# Altium PCB ETL_RB.PcbDoc (part 3 of 3)
Units mm, origin at the board's own origin, x right, y up, seen from the top; angles counter-clockwise.
Board outline 130.3 x 56.5 mm, 8 copper layers (Top Layer, plane 1, M1, plane 2, plane 3, M2, plane 4, Bottom Layer), stack 0.937 mm thick; 226 components, 231 nets, 2035 pads, 85 vias.
Unrouted connection lines stored in the file: 487.
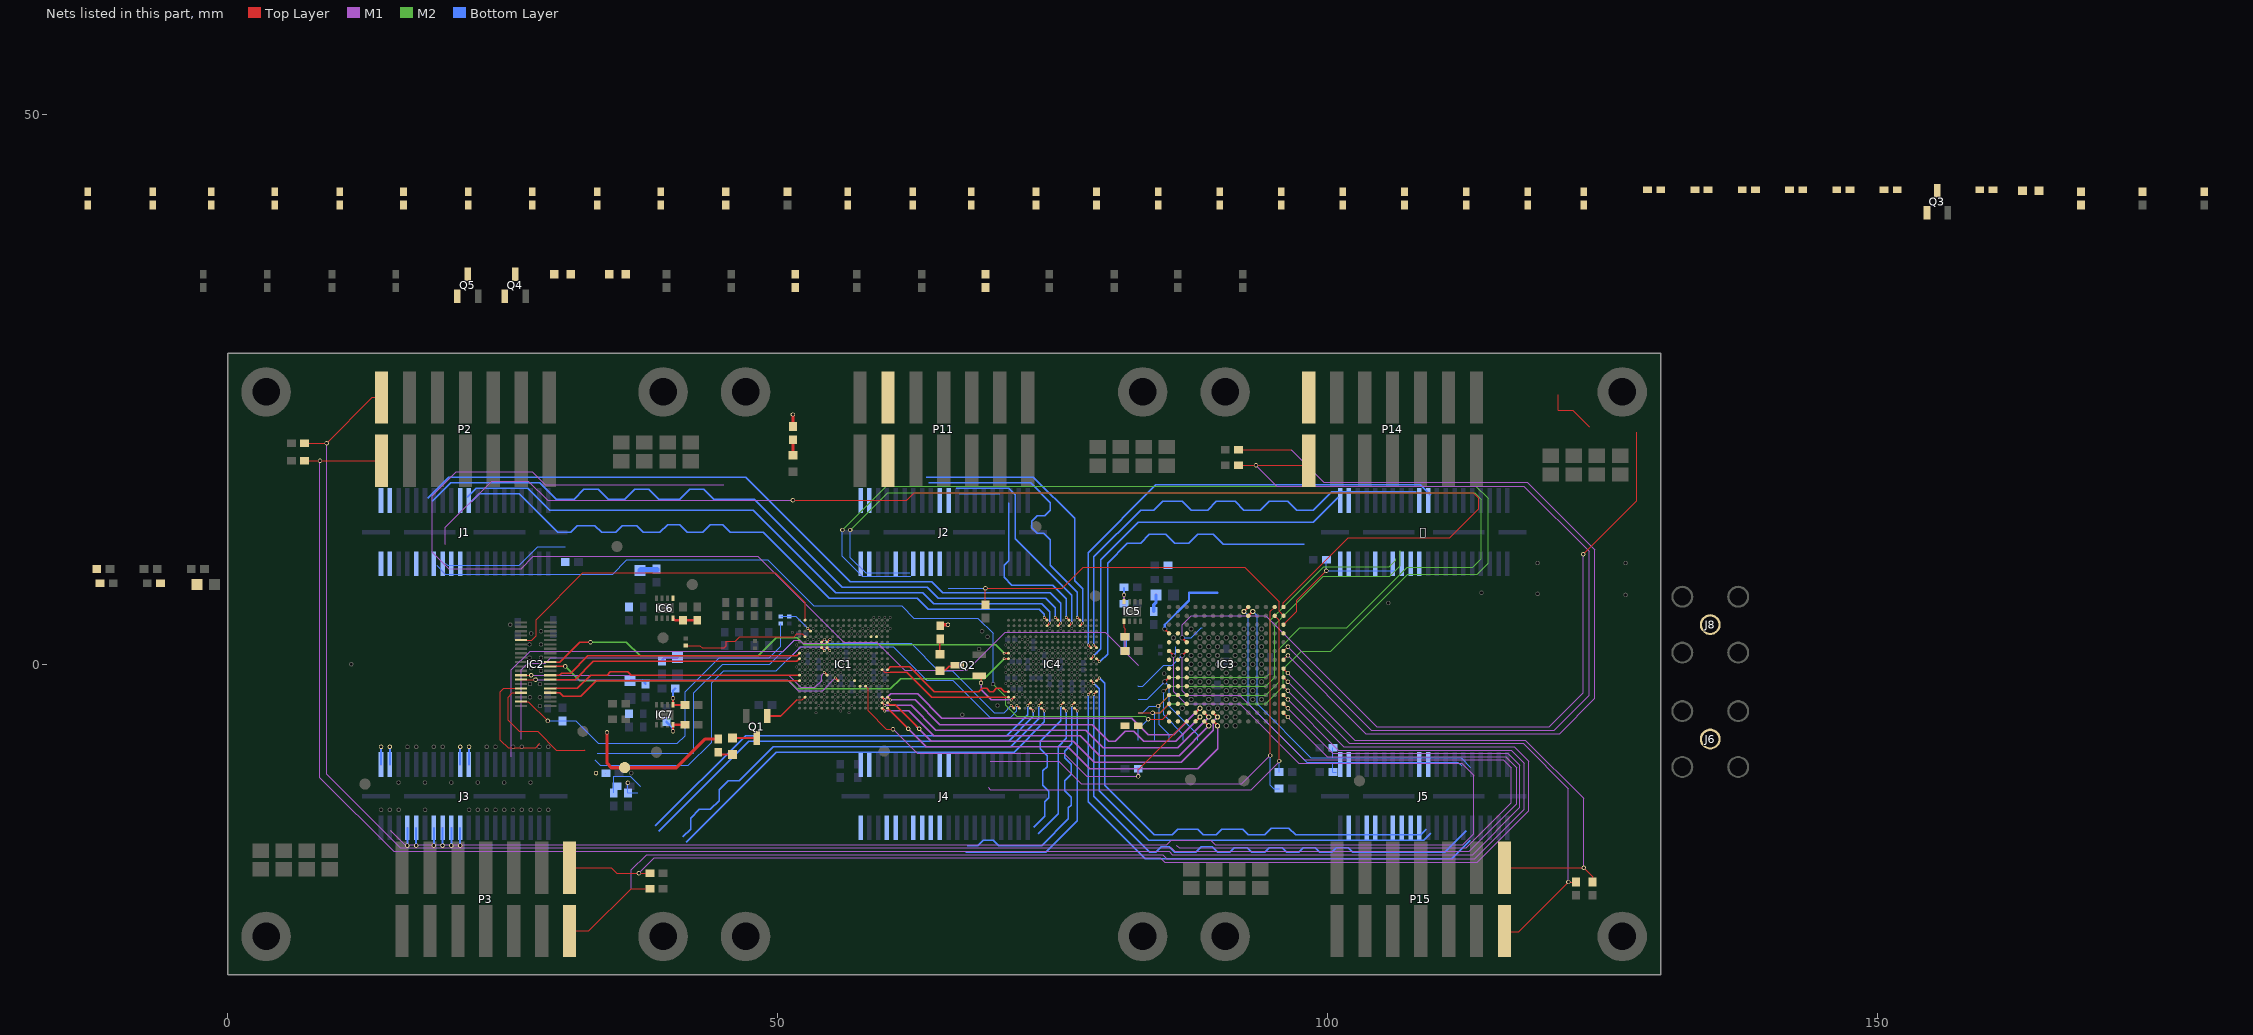
[diagram p9: the nets of this part, all layers, seen from the top]

## Via types
v1: diameter 0.4, hole 0.25, Top Layer to Bottom Layer, 85 vias

## Nets (pads, with @x,y where several pads share a name; then routed paths per layer and width w, separated by ;. In a path a pad name is that pad's centre, name@x,y a point inside that pad or via, vN(x,y) a via of type N, cw(c..) or ccw(c..) an arc to the next point about the centre after c; other vN are vias at no path point) (continued)
LD_DIS: IC1.L6 IC2.16 pad.1@27.6,-1 pad.1@54.25,-0.75 | length 29.2
  Top Layer w0.102: IC2.16@26.67,-1 pad.1@27.6,-1
  Top Layer w0.13: pad.1@54.25,-0.75 IC1.L6@54.5,-1
  M1 w0.102: pad.1@27.6,-1 51,-1 52.1,-2.1 53.4,-2.1 54,-1.5 54,-1 pad.1@54.25,-0.75
LD_RSTN: IC1.M8 IC2.14 pad.1@28,-1.4 pad.1@55.25,-1.25 | length 29.8
  Top Layer w0.102: IC2.14@26.67,-1.4 pad.1@28,-1.4
  Top Layer w0.13: pad.1@55.25,-1.25 IC1.M8@55.5,-1.5
  M1 w0.102: pad.1@28,-1.4 50.9,-1.4 51.9,-2.4 54.1,-2.4 pad.1@55.25,-1.25
led0: IC1.N12 Q4.1
led1: IC1.M11 Q5.1
lv_mon: C30.2 IC3.M4 R17.1 R19.2
LV_RB: P11.3 P11.4 pad.1@65.5,3.6 R1.1 R3.1 R16.1 R17.2 R18.1 R24.1 R129.1 R130.1 R131.1 R142.1 TP5.1 | length 16
  Top Layer w0.3: v1(34.5,-6.2) 34.5,-9 34.9,-9.4 TP5.1@36.1,-9.4 40.8,-9.4 43.4,-6.8 R142.1@44.6,-6.8 ; R1.1@51.4,21.6 v1(51.4,22.7) ; R3.1@64.8,3.505 64.895,3.6 pad.1@65.5,3.6
M1SCL: IC1.E6 J1.39 pad.1@33.5,-9.9 pad.1@54.775,2.25 R103.2 | length 38.6
  Top Layer w0.13: IC1.E6@54.5,2 54.75,2.25 pad.1@54.775,2.25
  M1 w0.102: 25.8,-8.4 25.8,-0.5 27.5,1.2 50.5,1.2 51.5,2.2 52,2.2 52.3,1.9 54.425,1.9 pad.1@54.775,2.25
M1SDA: IC1.F6 J1.37 pad.1@54.75,1.25 R104.2 | length 35.7
  Top Layer w0.13: IC1.F6@54.5,1.5 pad.1@54.75,1.25
  M1 w0.102: 26.7,-6.8 26.7,-0.5 27.3,0.1 28.9,0.1 29.4,0.6 51.1,0.6 52.1,1.6 54.4,1.6 pad.1@54.75,1.25
M2SCL: IC1.E5 IC2.10 IC4.U2 pad.1@54.275,2.25 pad.1@71.25,-3.75 R105.1 | length 63.9
  Top Layer w0.102: IC2.10@26.67,-2.2 25.1,-2.2 24.8,-2.5 24.8,-6.9 25.5,-7.6 28,-7.6 28.4,-7.2
  Top Layer w0.13: IC1.E5@54,2 54.25,2.25 pad.1@54.275,2.25 ; pad.1@71.25,-3.75 IC4.U2@71.5,-4
  Bottom Layer w0.102: 33.6,-8.1 42.34,-8.1 42.4,-8.04 42.4,-2.6 45,0 49.3,0 51.5,2.2 52,2.2 52.3,1.9 53.925,1.9 pad.1@54.275,2.25 54.625,1.9 62.145,1.9 64.622,-0.577 65.877,-0.577 69.7,-4.4 70.6,-4.4 pad.1@71.25,-3.75 ; R105.1@35.1,-11.7 35.1,-10.2 36.6,-10.2 37.5,-11.1
M2SDA: IC1.F5 IC2.8 IC4.U3 pad.1@54.251,1.226 pad.1@71.75,-3.75 R106.1 | length 64
  Top Layer w0.102: IC2.8@26.67,-2.6 25.9,-2.6 25.5,-3 25.5,-5.1 26.5,-6.1 28.2,-6.1 29.9,-7.8 32.473,-7.8 32.5,-7.773
  Top Layer w0.13: IC1.F5@54,1.5 54.251,1.249 pad.1@54.251,1.226 ; pad.1@71.75,-3.75 IC4.U3@72,-4
  Bottom Layer w0.102: 33.4,-8.7 33.9,-9.2 41.9,-9.2 44,-7.1 44,-1.7 45.1,-0.6 49.9,-0.6 52.1,1.6 53.877,1.6 pad.1@54.251,1.226 54.625,1.6 60.5,1.6 63.55,-1.45 65.95,-1.45 69.3,-4.8 71.2,-4.8 71.75,-4.25 pad.1@71.75,-3.75 ; v1(36.4,-10.773) R106.1@36.4,-11.7 37.3,-11.7
m_tx_n: IC1.G1 IC2.15 | length 23.5
  Top Layer w0.12: IC2.15@29.33,-1 30.165,-1 30.365,-0.8 31.2,-0.8 32.75,0.75 51.75,0.75 IC1.G1@52,1
m_tx_p: IC1.H1 IC2.13 | length 23.5
  Top Layer w0.12: IC2.13@29.33,-1.4 31.6,-1.4 33.25,0.25 51.75,0.25 IC1.H1@52,0.5
MASTER_READY: IC1.R2 Q1.1 | length 4.1
  Top Layer w0.076: 51.75,-3.25 52.25,-3.25 IC1.R2@52.5,-3
  Top Layer w0.15: Q1.1@49.068,-4.7 50.3,-4.7 51.75,-3.25
mod_a0: C201.2 IC3.N14 J1.21
mod_a1: C3.2 IC3.P14 J1.23
mod_a2: C4.2 IC3.N13 J1.25
mod_a3: C5.2 IC3.P13 J1.27 | length 79.3
  Top Layer w0.102: v1(83.7,-5) 85,-5 IC3.P13@85.6,-4.4
  M2 w0.102: 69.6,-1.8 70.75,-2.95 70.75,-3.75 71.75,-4.75 83.45,-4.75 v1(83.7,-5)
  Bottom Layer w0.102: 19,9 19.8,8.2 35,8.2 36.3,9.5 49.1,9.5 53.3,5.3 61.3,5.3 62.4,4.2 68.2,4.2 69.6,2.8 69.6,-1.8 ; 82.8,-6.9 82.8,-5.6 83.1,-5.6 v1(83.7,-5)
mod_a4: C6.2 IC3.M12
mod_a5: C7.2 IC3.N12 J3.21 pad.1@21.145,-16.491 | length 1.7
  Bottom Layer w0.178: pad.1@21.15,-16.53 J3.21@21.15,-14.865
mod_a6: C8.2 IC3.P12 J3.23 pad.1@20.345,-16.491 | length 120.5
  Top Layer w0.102: 82.8,-4.4 v1(84.1,-4.4) 84.8,-4.4 IC3.P12@85.6,-3.6
  M2 w0.102: v1(55.9,12.2) 59.9,16.2 113.5,16.2 114.6,15.1 114.6,9.2 113.6,8.2 107.3,8.2 100.3,1.2 97.6,1.2 96,-0.4 96,-2 94.4,-3.6 85.6,-3.6 84.8,-4.4 v1(84.1,-4.4)
  Bottom Layer w0.102: v1(55.9,12.2) 55.9,9.8 57.7,8 62.1,8 ; v1(84.1,-4.4) 84.3,-4.6 84.3,-6.9
  Bottom Layer w0.178: pad.1@20.35,-16.53 J3.23@20.35,-14.865
mod_a7: C9.2 IC3.M11 J3.25 pad.1@19.545,-16.491 | length 1.7
  Bottom Layer w0.178: pad.1@19.55,-16.53 J3.25@19.55,-14.865
mod_a8: C10.2 IC3.N11 J3.27 pad.1@18.745,-16.491 | length 1.7
  Bottom Layer w0.178: pad.1@18.75,-16.53 J3.27@18.75,-14.865
mod_a9: C11.2 IC3.P11 J2.21 | length 116.6
  Top Layer w0.102: v1(84.6,-3.8) IC3.P11@85.6,-2.8
  M2 w0.102: v1(56.6,12.2) 60,15.6 113.4,15.6 114,15 114,9.6 113.2,8.8 107.262,8.8 101.762,3.3 97.5,3.3 95.6,1.4 95.6,-1.6 94.4,-2.8 85.6,-2.8 v1(84.6,-3.8)
  Bottom Layer w0.102: v1(56.6,12.2) 56.6,9.7 58,8.3 62,8.3 ; 82.8,-4.4 83.2,-4.4 83.8,-3.8 v1(84.6,-3.8) 84.7,-3.9 84.7,-5.5 85.6,-6.4 85.6,-6.9
mod_a10: C12.2 IC3.M10 J2.23
mod_a11: C13.2 IC3.N10 J2.25
mod_a12: C14.2 IC3.P10 J2.27 | length 36.3
  Top Layer w0.102: 85.1,-2.45 85.15,-2.45 IC3.P10@85.6,-2
  M2 w0.102: 85.1,-2.45 85.15,-2.45 85.6,-2 94.4,-2 95.2,-1.2 95.2,3.6 99.619,8.019 105.681,8.019 106.6,8.938 106.6,10.3
  Bottom Layer w0.102: 85.1,-2.45 85.1,-4.6 86.9,-6.4 86.9,-6.9
mod_a13: C15.2 IC3.M9 J4.21
mod_a14: C16.2 IC3.N9 J4.23
mod_a15: C17.2 IC3.P9 J4.25 | length 38.7
  Top Layer w0.13: 85.2,-1.6 IC3.P9@85.6,-1.2
  M2 w0.102: 85.2,-1.6 85.6,-1.2 94.4,-1.2 94.8,-0.8 94.8,4 99.681,8.881 105.619,8.881 106.2,9.462 106.2,9.6
  Bottom Layer w0.102: 82.8,-3.2 83.6,-3.2 85.2,-1.6 85.6,-2 85.6,-3.8 88.2,-6.4 88.2,-6.9
mod_a16: C18.2 IC3.M8 J4.27
mod_a17: .21 C19.2 IC3.N8
mod_a18: .23 C20.2 IC3.P8
mod_a19: .25 C21.2 IC3.M7
mod_a20: .27 C22.2 IC3.N7
mod_a21: C23.2 IC3.P7 J5.21
mod_a22: C24.2 IC3.M6 J5.23 | length 77.2
  Top Layer w0.13: 86.8,0.8 IC3.M6@87.2,1.2
  M1 w0.102: 86.25,-16.45 86.5,-16.7 112.6,-16.7 116.7,-12.6 116.7,-9.4 116,-8.7 97.9,-8.7 92,-2.8 87.2,-2.8 86.8,-2.4 86.8,0.8
  Bottom Layer w0.102: 82.8,-1.95 82.8,-2 83.2,-2 85.1,-0.1 85.9,-0.1 86.8,0.8
mod_a23: C25.2 IC3.N6 J5.25 | length 105.2
  M1 w0.102: 45.1,16.3 28.9,16.3 27.7,17.5 20.8,17.5 18.6,15.3 18.6,10.2 20.1,8.7 26.7,8.7 27.8,9.8 48.2,9.8 56,2 59,2 61.55,-0.55 67.25,-0.55 70.7,2.9 79.8,2.9 82.8,-0.1
mod_a24: C26.2 IC3.P6 J5.27 | length 140.3
  Top Layer w0.13: IC3.P6@85.6,1.2 86,0.8
  M1 w0.102: 14.8,-15.1 16.1,-16.4 85.4,-16.4 85.8,-16 89.4,-16 89.8,-16.4 112.3,-16.4 113.3,-15.4 113.3,-10.1 112.2,-9 97.4,-9 92,-3.6 87.1,-3.6 86,-2.5 86,0.8
  Bottom Layer w0.102: 86,0.8 86.2,1 86.2,1.6
mod_d0: J1.31
mod_d2: J3.31 pad.1@17.145,-16.491 | length 1.7
  Bottom Layer w0.178: pad.1@17.15,-16.53 J3.31@17.15,-14.865
mod_d3: J3.33 pad.1@16.345,-16.491 | length 1.7
  Bottom Layer w0.178: pad.1@16.35,-16.53 J3.33@16.35,-14.865
mod_d4: J2.31
mod_d6: J4.31
mod_d7: J4.33
mod_d8: .31
mod_d10: J5.31
mod_d11: J5.33
NetC3_1: C3.1 C4.1 C5.1 C6.1 C7.1 C8.1 C9.1 C10.1 C11.1 C12.1 C13.1 C14.1 C15.1 C16.1 C17.1 C18.1 C19.1 C20.1 C21.1 C22.1 C23.1 C24.1 C25.1 C26.1 C27.1 C28.1 C29.1 C30.1 C31.1 C32.1 C201.1
NetC27_2: C27.2 IC3.M5 | length 76.7
  Top Layer w0.102: 121,24.5 121,23.1 122.3,23.1 123.8,21.6 ; v1(123.25,10) 128.1,14.85 128.1,21.1
  Top Layer w0.13: 86.8,2.4 IC3.M5@87.2,2
  M1 w0.102: 86.8,2.4 86.8,3.6 87.6,4.4 94.4,4.4 104.5,-5.7 120.15,-5.7 123.25,-2.6 v1(123.25,10)
  Bottom Layer w0.102: 86.8,2.4 87.6,2.4 88.5,3.3 88.6,3.3
NetC28_2: C28.2 IC3.N5
NetC29_2: C29.2 IC3.P5
NetC31_2: C31.2 IC3.N4
NetC32_2: C32.2 IC3.P4 | length 7.4
  Top Layer w0.13: 85.2,3.2 IC3.P4@85.6,2.8
  Bottom Layer w0.2: 85.2,3.2 85.2,3.6 87.4,5.8 87.4,6.5 90,6.5
NetC107_1: C107.1 R111.2 | length 1.6
  Bottom Layer w0.3: R111.2@84.2,4.8 84.2,5.4 84.4,5.6 C107.1@84.4,6.3
NetC155_1: C155.1 R128.2 | length 1.3
  Bottom Layer w0.3: C155.1@81.6,1.2 R128.2@81.6,2.5
NetD1_1: D1.1 R1.2 | length 1.4
  Top Layer w0.3: R1.2@51.4,20.4 51.409,20.391 51.409,19.004 D1.1@51.417,18.995
NetD2_1: D2.1 R142.2 | length 1.4
  Top Layer w0.2: R142.2@44.6,-8 44.8,-8.2 D2.1@45.911,-8.2
NetD2_2: D2.2 Q1.3 | length 2.2
  Top Layer w0.2: D2.2@45.911,-6.7 Q1.3@48.118,-6.7
NetD3_1: D3.1 R3.2 | length 1.4
  Top Layer w0.13: D3.1@64.768,0.9 64.768,2.273 R3.2@64.8,2.305
NetD3_2: D3.2 Q2.3 | length 1.8
  Top Layer w0.13: D3.2@64.768,-0.6 64.868,-0.5 65.3,-0.5 65.606,-0.194 66.256,-0.194 Q2.3@66.35,-0.1
NetD4_1: D4.1 R16.2
NetD4_2: D4.2 Q3.3
NetD5_1: D5.1 R24.2
NetD5_2: D5.2 Q4.3
NetD6_1: D6.1 R18.2
NetD6_2: D6.2 Q5.3
NetIC1_R16: IC1.R16 IC3.L13 pad.1@59.75,-3.25 pad.1@88.4,-4 | length 32.3
  Top Layer w0.13: IC1.R16@59.5,-3 pad.1@59.75,-3.25 ; IC3.L13@88,-4.4 pad.1@88.4,-4
  M1 w0.12: pad.1@59.75,-3.25 60.3,-2.7 62.75,-2.7 64.95,-4.9 82.2,-4.9 83.7,-6.4 86,-6.4 pad.1@88.4,-4
NetIC1_R17: IC1.R17 IC3.L14 pad.1@60.25,-3.25 pad.1@88.4,-4.8 | length 32.3
  Top Layer w0.13: IC1.R17@60,-3 pad.1@60.25,-3.25 ; IC3.L14@88,-5.2 pad.1@88.4,-4.8
  M1 w0.12: pad.1@60.25,-3.25 62.5,-3.25 64.75,-5.5 78.6,-5.5 80.1,-7 80.7,-7 81.6,-6.1 82.4,-6.1 83.3,-7 86.2,-7 pad.1@88.4,-4.8
NetIC1_T16: IC1.T16 IC3.K13 pad.1@59.75,-3.75 pad.1@89.2,-4.8 | length 33.1
  Top Layer w0.13: IC1.T16@59.5,-3.5 pad.1@59.75,-3.75 ; IC3.K13@88.8,-4.4 pad.1@89.2,-4.8
  M1 w0.12: pad.1@59.75,-3.75 62.15,-3.75 64.4,-6 78,-6 79.6,-7.6 86.4,-7.6 pad.1@89.2,-4.8
NetIC1_T17: IC1.T17 IC3.J13 pad.1@62.875,-5.875 pad.1@90,-4.8 | length 35.7
  Top Layer w0.12: IC1.T17@60,-3.5 60.2,-3.7 60.7,-3.7 pad.1@62.875,-5.875
  Top Layer w0.13: IC3.J13@89.6,-4.4 pad.1@90,-4.8
  M1 w0.12: pad.1@62.875,-5.875 62.871,-5.875 62.625,-5.629 63.996,-7 76.9,-7 78.8,-8.9 86.7,-8.9 89.6,-6 89.6,-5.2 pad.1@90,-4.8
NetIC1_U16: IC1.U16 IC3.K14 pad.1@59.75,-4.25 pad.1@89.2,-5.6 | length 33.2
  Top Layer w0.13: IC1.U16@59.5,-4 pad.1@59.75,-4.25 ; IC3.K14@88.8,-5.2 pad.1@89.2,-5.6
  M1 w0.12: pad.1@59.75,-4.25 61.95,-4.25 64.2,-6.5 77.5,-6.5 79.3,-8.3 86.5,-8.3 pad.1@89.2,-5.6
NetIC1_U17: IC1.U17 IC3.J14 pad.1@61.875,-5.875 pad.1@90,-5.6 | length 35.7
  Top Layer w0.12: IC1.U17@60,-4 pad.1@61.875,-5.875
  Top Layer w0.13: IC3.J14@89.6,-5.2 pad.1@90,-5.6
  M1 w0.12: pad.1@61.875,-5.875 63.5,-7.5 76.4,-7.5 78.4,-9.5 88.2,-9.5 90,-7.7 pad.1@90,-5.6
NetIC5_4: IC5.4 R126.1 R127.2 | length 2.2
  Top Layer w0.102: IC5.4@81.5,5.7 v1(81.5,6.3)
  Bottom Layer w0.2: R127.2@81.5,5.5 v1(81.5,6.3) 81.5,6.2 R126.1@81.5,6.9
NetIC5_5: IC5.5 R112.1 R113.2 | length 2.7
  Top Layer w0.102: IC5.5@81.5,3.9 81.5,3.3 81.6,3.2 R112.1@81.6,1.2
NetJ4_39: J4.39 R15.2
NetJ5_37: J5.37 R14.2
ON0: IC3.A12 P2.1 pad.1@96.4,-4 R233.1 | length 177.2
  Top Layer w0.102: R233.1@7,18.5 v1(8.4,18.5) P2.1@14,18.5 ; IC3.A12@96,-3.6 pad.1@96.4,-4
  M1 w0.102: v1(8.4,18.5) 8.4,-10.3 15.1,-17 85.6,-17 85.9,-17.3 113.2,-17.3 117.5,-13 117.5,-9.2 116.4,-8.1 100.5,-8.1 pad.1@96.4,-4
ON1: IC3.A10 P3.1 pad.1@96.4,-2.4 R234.1 | length 120.7
  Top Layer w0.102: P3.1@31.1,-18.5 34.9,-18.5 35.4,-19 v1(37.4,-19) R234.1@38.4,-19 ; IC3.A10@96,-2 pad.1@96.4,-2.4
  M1 w0.102: v1(37.4,-19) 38.8,-17.6 84.8,-17.6 85.2,-18 113.6,-18 118.3,-13.3 118.3,-8.8 117,-7.5 101.5,-7.5 pad.1@96.4,-2.4
ON2: IC3.A6 P14.1 pad.1@96.4,1.6 R235.1 | length 85
  Top Layer w0.102: R235.1@91.9,18.1 P14.1@97.9,18.1 ; IC3.A6@96,1.2 pad.1@96.4,1.6
  M1 w0.102: v1(93.5,18.1) 95.4,16.2 117.85,16.2 123.8,10.25 123.8,-2.8 120.6,-6 104,-6 pad.1@96.4,1.6
ON3: IC3.A8 P15.1 pad.1@96.4,-0.8 R236.1 | length 47.3
  Top Layer w0.102: IC3.A8@96,-0.4 pad.1@96.4,-0.8 ; P15.1@116.1,-18.5 v1(123.3,-18.5) 124.1,-19.3 R236.1@124.1,-19.8
  M1 w0.102: pad.1@96.4,-0.8 102.5,-6.9 118,-6.9 123.3,-12.2 v1(123.3,-18.5)
PG0: IC3.A13 P2.2 pad.1@96.4,-4.8 R202.1 | length 178.3
  Top Layer w0.102: R202.1@7,20.1 v1(9,20.1) 13.15,24.25 P2.2@14,24.25 ; IC3.A13@96,-4.4 pad.1@96.4,-4.8
  M1 w0.102: v1(9,20.1) 9,-10 15.7,-16.7 85.8,-16.7 86.1,-17 112.9,-17 117.2,-12.7 117.2,-9.4 116.2,-8.4 100,-8.4 pad.1@96.4,-4.8
PG1: IC3.A11 P3.2 pad.1@96.4,-3.2 R204.1 | length 123.1
  Top Layer w0.102: P3.2@31.1,-24.25 32.85,-24.25 36.7,-20.4 R204.1@38.4,-20.4 ; IC3.A11@96,-2.8 pad.1@96.4,-3.2
  M1 w0.102: 36.7,-20.4 36.7,-18.7 38.1,-17.3 85,-17.3 85.4,-17.7 113.4,-17.7 117.9,-13.2 117.9,-9 116.7,-7.8 101,-7.8 pad.1@96.4,-3.2
PG2: IC3.A7 P14.2 pad.1@96.4,0.8 R206.1 | length 82.4
  Top Layer w0.102: R206.1@91.9,19.5 96.7,19.5 ; IC3.A7@96,0.4 pad.1@96.4,0.8
  M1 w0.102: pad.1@96.4,0.8 103.5,-6.3 121.1,-6.3 124.3,-3.1 124.3,10.4 118.15,16.55 99.65,16.55 96.7,19.5
PG3: IC3.A9 P15.2 pad.1@96.4,-1.6 R208.1 | length 47
  Top Layer w0.102: IC3.A9@96,-1.2 pad.1@96.4,-1.6 ; P15.2@116.1,-24.25 116.15,-24.3 117.4,-24.3 v1(121.9,-19.8) R208.1@122.6,-19.8
  M1 w0.102: pad.1@96.4,-1.6 102,-7.2 117.8,-7.2 121.9,-11.3 v1(121.9,-19.8)
REFCLKN: IC1.K17 IC4.P1 | length 12.5
  Top Layer w0.12: IC1.K17@60,-0.5 60.25,-0.25 62,-0.25 64.25,-2.5 68.3,-2.5 68.6,-2.2 69,-2.2 69.3,-2.5 69.6,-2.5 69.9,-2.2 70.3,-2.2 70.6,-2.5 IC4.P1@71,-2.5
REFCLKP: IC1.K16 IC4.R1 | length 12.5
  Top Layer w0.076: IC1.K16@59.5,-0.5 59.75,-0.75 60.25,-0.75
  Top Layer w0.12: 60.25,-0.75 61.75,-0.75 64,-3 IC4.R1@71,-3
RSSI: IC2.4 R147.2 R148.1 | length 33.3
  Top Layer w0.102: IC2.4@26.67,-3.4 27.35,-3.4 v1(29.1,-5.15)
  Bottom Layer w0.102: v1(29.1,-5.15) R148.1@30.45,-5.15 31.65,-5.15 33.7,-7.2 40.9,-7.2 41.6,-6.5 41.6,-2.5 44.7,0.6 49.25,0.6 50.3,1.65 R147.2@50.3,3.7
RSSI_ADC: IC1.C3 pad.1@52.75,3.25 R146.2 R147.1 | length 3.3
  Top Layer w0.13: pad.1@52.75,3.25 IC1.C3@53,3
  Bottom Layer w0.102: R147.1@50.3,4.35 R146.2@51.05,4.35 51.65,4.35 pad.1@52.75,3.25
RSTB0: IC3.A1 R239.1 | length 132.8
  Top Layer w0.102: v1(51.4,14.9) 61.75,14.9 62.45,15.6 113.25,15.6 113.75,15.1 113.75,14.15 111.1,11.5 101.9,11.5 96,5.6 IC3.A1@96,5.2
  M1 w0.102: 19.8,10.9 19.8,12.45 24,16.65 27.35,16.65 29.1,14.9 v1(51.4,14.9)
  Bottom Layer w0.102: 19.8,9.2 20,9 26.5,9 28.2,10.7 30.7,10.7
RSTB1: IC3.A2 pad.1@68.9,6.9 R238.1 | length 35.1
  Top Layer w0.102: R238.1@68.9,5.4 pad.1@68.9,6.9 75.9,6.9 77.8,8.8 92.5,8.8 95.6,5.7 95.6,4.8 IC3.A2@96,4.4
  Bottom Layer w0.102: 65.5,6.9 pad.1@68.9,6.9
RSTB2: IC3.A3 R237.1 | length 13.8
  Top Layer w0.102: IC3.A3@96,3.6 97.2,4.8 97.2,5.8 v1(99.9,8.5)
  Bottom Layer w0.102: R237.1@99.9,9.5 v1(99.9,8.5) 106.2,8.5
rxesra: C169.1 R125.1 | length 1.6
  Bottom Layer w0.2: C169.1@36.6,-1.5 37.75,-1.5 38,-1.75 R125.1@38,-1.8
rxesrb: C2.1 R11.1 | length 1.6
  Bottom Layer w0.2: R11.1@39.5,0.3 39.5,0.35 39.75,0.6 C2.1@40.9,0.6
rxfba: IC7.4 R123.1 R124.2 | length 2.8
  Top Layer w0.2: v1(40.5,-6.1) IC7.4@40.5,-5.5 R123.1@41.6,-5.5
  Bottom Layer w0.2: R124.2@39.9,-5.2 39.9,-5.25 40.462,-5.812 40.462,-6.062 v1(40.5,-6.1)
rxfbb: IC7.5 R12.1 R13.2 | length 2.7
  Top Layer w0.2: v1(40.5,-3.1) IC7.5@40.5,-3.7 R12.1@41.6,-3.7
  Bottom Layer w0.2: v1(40.5,-3.1) 40.5,-2.4 R13.2@40.7,-2.2
rxn: IC1.M1 IC2.7 | length 23.4
  Top Layer w0.12: IC2.7@29.33,-2.6 30.2,-2.6 30.5,-2.9 32.1,-2.9 33.5,-1.5 IC1.M1@52,-1.5
rxp: IC1.L1 IC2.9 | length 23.4
  Top Layer w0.12: IC2.9@29.33,-2.2 31.8,-2.2 33,-1 34.5,-1 34.8,-0.7 36.4,-0.7 36.7,-1 IC1.L1@52,-1
s_tx_n: IC2.21 IC4.G1 pad.1@70.6,1 | length 44.2
  Top Layer w0.12: IC2.21@29.33,0.2 30.2,0.2 32,2 v1(33,2)
  Top Layer w0.13: pad.1@70.6,1 IC4.G1@71,1
  M2 w0.12: v1(33,2) 36.25,2 37.5,0.75 48.25,0.75 49.9,2.4 51.8,2.4 52.45,1.75 69.85,1.75 pad.1@70.6,1
s_tx_p: IC2.19 IC4.H1 pad.1@70.6,0.5 | length 43.7
  Top Layer w0.12: IC2.19@29.33,-0.2 v1(30.7,-0.2)
  Top Layer w0.13: pad.1@70.6,0.5 IC4.H1@71,0.5
  M2 w0.12: v1(30.7,-0.2) 32,-1.5 51,-1.5 51.75,-2.25 60.25,-2.25 61.2,-1.3 68.8,-1.3 pad.1@70.6,0.5
SCA_GPIO27: IC3.A4 Q3.1
sca_resetb: IC1.N13 IC3.M14 R107.2 | length 36.9
  Top Layer w0.076: IC1.N13@58,-2 58.25,-2.25 58.25,-4.25
  Top Layer w0.102: 58.25,-4.25 59.9,-5.9 v1(60.5,-5.9) ; v1(82.8,-10.2) 82.8,-9.6 IC3.M14@87.2,-5.2
  M1 w0.102: v1(60.5,-5.9) 62.7,-8.1 76,-8.1 78.1,-10.2 v1(82.8,-10.2)
  Bottom Layer w0.2: v1(82.8,-10.2) R107.2@82.8,-9.5
SCL1: IC3.B2 J2.39 R210.1 | length 42
  Top Layer w0.102: IC3.B2@95.2,4.4 95.6,4 v1(95.6,-8.8)
  M1 w0.102: 69.15,-11.2 69.35,-11.4 93.05,-11.4 95.6,-8.85 v1(95.6,-8.8)
  Bottom Layer w0.102: R210.1@95.6,-9.8 v1(95.6,-8.8)
SCL2: .39 IC3.E2 pad.1@93.2,4.8 R244.1 | length 31.8
  Top Layer w0.13: IC3.E2@92.8,4.4 pad.1@93.2,4.8
  Bottom Layer w0.102: pad.1@93.2,4.8 93.6,4.4 93.6,-3.6 98.5,-8.5 100.5,-8.5 ; R244.1@100.5,-7.6 100.5,-8.5 ; 113,-9.35 112.15,-8.5 100.5,-8.5
SDA1: IC3.B1 J2.37 R245.1 | length 44.6
  Top Layer w0.102: v1(94.8,-8.3) 94.8,4.8 IC3.B1@95.2,5.2
  M1 w0.102: 69.35,-8.8 75.55,-8.8 77.6,-10.85 92.2,-10.85 94.75,-8.3 v1(94.8,-8.3)
  Bottom Layer w0.102: v1(94.8,-8.3) 94.8,-11 95.1,-11.3 R245.1@95.6,-11.3
SDA2: .37 IC3.E1 pad.1@92.4,4.8 R246.1 | length 32.1
  Top Layer w0.13: pad.1@92.4,4.8 IC3.E1@92.8,5.2
  Bottom Layer w0.102: pad.1@92.4,4.8 92.8,4.4 92.8,-3.6 98.1,-8.9 100.5,-8.9 ; R246.1@100.8,-9.8 R246.1@100.5,-9.8 100.5,-8.9 ; 112.2,-9.25 111.85,-8.9 100.5,-8.9
SLAVE_READY: IC4.R2 pad.1@68.5,-1.7 pad.1@71.25,-3.25 Q2.1 | length 4.8
  Top Layer w0.13: Q2.1@68.35,-1.05 68.5,-1.2 pad.1@68.5,-1.7 ; pad.1@71.25,-3.25 IC4.R2@71.5,-3
  M1 w0.13: pad.1@68.5,-1.7 68.5,-2.3 69.45,-3.25 pad.1@71.25,-3.25
SMA_CLKN: IC1.D15 J8.1
SMA_CLKP: IC1.D14 J6.1
T_EDIN00N: IC4.U5 J3.38 pad.1@14.755,-7.509 pad.1@73.25,-4.25 | length 40.9
  Top Layer w0.13: IC4.U5@73,-4 pad.1@73.25,-4.25
  Bottom Layer w0.12: 39.2,-15.2 47.4,-7 68.5,-7
  Bottom Layer w0.13: 68.5,-7 71,-7 73.25,-4.75 pad.1@73.25,-4.25
  Bottom Layer w0.178: J3.38@14.75,-9.135 pad.1@14.75,-7.47
T_EDIN00P: IC4.T5 J3.40 pad.1@13.955,-7.509 pad.1@72.75,-3.75 | length 40.9
  Top Layer w0.13: pad.1@72.75,-3.75 IC4.T5@73,-3.5
  Bottom Layer w0.12: 38.9,-14.7 47.1,-6.5 70.85,-6.5 72.75,-4.6 pad.1@72.75,-3.75
  Bottom Layer w0.178: J3.40@13.95,-9.135 pad.1@13.95,-7.47
T_EDIN02N: IC4.U7 J3.20 pad.1@21.955,-7.509 pad.1@74.25,-4.25 | length 40.1
  Top Layer w0.13: IC4.U7@74,-4 pad.1@74.25,-4.25
  Bottom Layer w0.12: 41.7,-16.2 49.9,-8 71.5,-8 74.25,-5.25 pad.1@74.25,-4.25
  Bottom Layer w0.178: J3.20@21.95,-9.135 pad.1@21.95,-7.47
T_EDIN02P: IC4.T7 J3.22 pad.1@21.155,-7.509 pad.1@73.75,-3.75 | length 41.2
  Top Layer w0.13: pad.1@73.75,-3.75 IC4.T7@74,-3.5
  Bottom Layer w0.12: 41.4,-15.7 42.1,-15 42.1,-14 42.9,-13.2 43.9,-13.2 44.7,-12.4 44.7,-11.4 45.5,-10.6 46.5,-10.6 49.6,-7.5 71.2,-7.5 73.75,-4.95 pad.1@73.75,-3.75
  Bottom Layer w0.178: J3.22@21.15,-9.135 pad.1@21.15,-7.47
T_EDIN10N: IC4.U11 J4.38 pad.1@76.25,-4.25 | length 12.6
  Top Layer w0.13: IC4.U11@76,-4 pad.1@76.25,-4.25
  Bottom Layer w0.12: 73.7,-15.4 75.5,-13.6 75.5,-7.5 76.25,-6.75 pad.1@76.25,-4.25
T_EDIN10P: IC4.T11 J4.40 pad.1@75.75,-3.75 | length 13.4
  Top Layer w0.13: pad.1@75.75,-3.75 IC4.T11@76,-3.5
  Bottom Layer w0.12: 73.3,-14.8 74.3,-13.8 74.3,-12.5 74.65,-12.15 74.65,-11.55 74.1,-11 74.1,-9.7 74.5,-9.3 74.5,-8.3 73.9,-7.7 73.9,-7 75.75,-5.15 pad.1@75.75,-3.75
T_EDIN12N: IC4.U13 J4.20 pad.1@77.25,-4.25 | length 21.7
  Top Layer w0.13: IC4.U13@77,-4 pad.1@77.25,-4.25
  Bottom Layer w0.12: 67.1,-17.1 74.4,-17.1 77.25,-14.25 pad.1@77.25,-4.25
T_EDIN12P: IC4.T13 J4.22 pad.1@76.75,-3.75 | length 22.4
  Top Layer w0.13: pad.1@76.75,-3.75 IC4.T13@77,-3.5
  Bottom Layer w0.12: 67.25,-16.5 68.2,-16.5 68.7,-16 69.6,-16 70.1,-16.5 74,-16.5 76.45,-14.05 76.45,-13.05 76.7,-12.8 76.7,-12.1 76.1,-11.5 76.1,-10.6 76.7,-10 76.7,-9.1 76.1,-8.5 76.1,-7.9 76.75,-7.25 pad.1@76.75,-3.75
T_EDIN20N: IC4.P17 J5.38 pad.1@78.75,-2.75 | length 48.5
  Top Layer w0.13: pad.1@78.75,-2.75 IC4.P17@79,-2.5
  Bottom Layer w0.12: pad.1@78.75,-2.75 78.75,-12 83.85,-17.1 84.4,-17.1 84.9,-16.6 85.6,-16.6 86.1,-17.1 88,-17.1 88.5,-16.6 89.5,-16.6 90,-17.1 91.1,-17.1 91.5,-16.7 92.7,-16.7 93.1,-17.1 94.3,-17.1 94.7,-16.7 95.9,-16.7 96.3,-17.1 97.4,-17.1 97.8,-16.7 98.9,-16.7 99.3,-17.1 100.4,-17.1 100.8,-16.7 101.9,-16.7 102.3,-17.1 110.65,-17.1 112.6,-15.15
T_EDIN20P: IC4.P16 J5.40 pad.1@78.25,-2.75 | length 47.7
  Top Layer w0.13: pad.1@78.25,-2.75 IC4.P16@78.5,-2.5
  Bottom Layer w0.12: pad.1@78.25,-2.75 78.25,-12.5 83.45,-17.7 111.3,-17.7 113,-16
T_EDIN22N: IC4.M17 J5.20 pad.1@79.25,-1.25 | length 43
  Top Layer w0.13: IC4.M17@79,-1.5 pad.1@79.25,-1.25
  Bottom Layer w0.12: pad.1@79.25,-1.25 79.75,-1.75 79.75,-11 84.25,-15.5 85.9,-15.5 86.4,-15 88.2,-15 88.7,-15.5 89.9,-15.5 90.4,-15 92.3,-15 92.8,-15.5 94.3,-15.5 94.9,-14.9 96.5,-14.9 97.1,-15.5 108.5,-15.5 109,-15
T_EDIN22P: IC4.M16 J5.22 pad.1@78.75,-1.75 | length 42.6
  Top Layer w0.13: IC4.M16@78.5,-1.5 pad.1@78.75,-1.75
  Bottom Layer w0.12: pad.1@78.75,-1.75 79.25,-2.25 79.25,-11.5 83.75,-16 108.75,-16 109.4,-15.35
T_EDIN30N: .40 IC4.H17 pad.1@79.25,0.25 | length 29.6
  Top Layer w0.13: IC4.H17@79,0.5 pad.1@79.25,0.25
  Bottom Layer w0.12: pad.1@79.35,0.25 80,0.9 80,9.2 81.8,11 83,11 83.8,11.8 85.3,11.8 86.1,11 87.4,11 88.2,11.8 89.6,11.8 90.5,10.9 97.9,10.9
T_EDIN30P: .38 IC4.H16 pad.1@78.75,0.75 | length 33.3
  Top Layer w0.13: IC4.H16@78.5,0.5 pad.1@78.75,0.75
  Bottom Layer w0.12: pad.1@78.75,0.75 79.4,1.4 79.4,9.5 82.8,12.9 98.7,12.9 101,15.2
T_EDIN32N: .22 IC4.F17 pad.1@78.75,1.75 | length 42.1
  Top Layer w0.13: pad.1@78.75,1.75 IC4.F17@79,1.5
  Bottom Layer w0.12: pad.1@78.75,1.75 78.75,9.75 83,14 84.2,14 85,14.8 86.8,14.8 87.6,14 89.1,14 89.9,14.8 91.6,14.8 92.4,14 93.9,14 94.7,14.8 96.4,14.8 97.2,14 98.7,14 100.4,15.7 108.05,15.7
T_EDIN32P: .20 IC4.F16 pad.1@78.25,1.75 | length 42.8
  Top Layer w0.13: pad.1@78.25,1.75 IC4.F16@78.5,1.5
  Bottom Layer w0.12: pad.1@78.25,1.75 78.25,10.15 84.4,16.3 108.45,16.3 109.4,15.35
T_EDIN40N: IC4.A14 J2.38 pad.1@77.25,4.25 | length 25.8
  Top Layer w0.13: pad.1@77.25,4.25 IC4.A14@77.5,4
  Bottom Layer w0.12: 63.75,16.5 73,16.5 74.8,14.7 74.8,14 74.3,13.5 73.6,13.5 73.1,13 73.1,12.4 73.6,11.9 74.2,11.9 74.8,11.3 74.8,9 77.25,6.55 pad.1@77.25,4.25
T_EDIN40P: IC4.B14 J2.40 pad.1@77.75,3.75 | length 25.2
  Top Layer w0.13: IC4.B14@77.5,3.5 pad.1@77.75,3.75
  Bottom Layer w0.12: 63.5,17 73.25,17 77,13.25 77,7.6 77.75,6.85 pad.1@77.75,3.75
T_EDIN42N: IC4.A12 J2.20 pad.1@76.25,4.25 | length 19.2
  Top Layer w0.13: pad.1@76.25,4.25 IC4.A12@76.5,4
  Bottom Layer w0.12: 66.5,15.5 70.2,15.5 ; 71,14.7 71,9.4 70.6,9 70.6,7.9 71.3,7.2 75,7.2 76.25,5.95 pad.1@76.25,4.25
T_EDIN42P: IC4.B12 J2.22 pad.1@76.75,3.75 | length 19.7
  Top Layer w0.13: IC4.B12@76.5,3.5 pad.1@76.75,3.75
  Bottom Layer w0.12: 66.25,16 71,16 71.6,15.4 71.6,11.4 76.75,6.25 pad.1@76.75,3.75
T_EDIN50N: IC4.A10 J1.38 pad.1@75.25,4.25 | length 65.5
  Top Layer w0.13: pad.1@75.25,4.25 IC4.A10@75.5,4
  Bottom Layer w0.12: 18.6,14.8 20.3,16.5 28.4,16.5 29.9,15 31.5,15 32.4,15.9 33.7,15.9 34.6,15 36.1,15 37,15.9 38.3,15.9 39.2,15 41.1,15 42,15.9 43.3,15.9 44.2,15 47.9,15 55.9,7 63.6,7 64.6,6 74.4,6 75.25,5.15 pad.1@75.25,4.25
T_EDIN50P: IC4.B10 J1.40 pad.1@75.75,3.75 | length 65.2
  Top Layer w0.13: IC4.B10@75.5,3.5 pad.1@75.75,3.75
  Bottom Layer w0.12: 18.2,15.1 20.1,17 47.1,17 56.6,7.5 64,7.5 65,6.5 74.8,6.5 75.75,5.55 pad.1@75.75,3.75
T_EDIN52N: IC4.A8 J1.20 pad.1@74.25,4.25 | length 59.7
  Top Layer w0.13: pad.1@74.25,4.25 IC4.A8@74.5,4
  Bottom Layer w0.12: 22.2,14.8 22.9,15.5 26.5,15.5 30,12 31.2,12 31.8,12.6 33.4,12.6 34,12 35.3,12 35.9,12.6 37.2,12.6 37.8,12 39.3,12 40,12.7 41.1,12.7 41.8,12 43.2,12 43.9,12.7 45,12.7 45.7,12 48.7,12 54.7,6 62.7,6 63.7,5 73.8,5 74.25,4.55 pad.1@74.25,4.25
T_EDIN52P: IC4.B8 J1.22 pad.1@74.75,3.75 | length 59.3
  Top Layer w0.13: IC4.B8@74.5,3.5 pad.1@74.75,3.75
  Bottom Layer w0.12: 21.8,15.2 22.6,16 27.3,16 29.3,14 47.8,14 55.3,6.5 63.2,6.5 64.2,5.5 74,5.5 74.75,4.75 pad.1@74.75,3.75
TH1: IC1.A2 IC2.32 | length 31.9
  Top Layer w0.102: IC2.32@26.67,2.2 27.65,2.2 28.05,2.6 28.05,4.05 32.3,8.3 43.75,8.3 49.8,8.3 52.5,5.6 IC1.A2@52.5,4
txesra: C108.1 R114.1 | length 1.5
  Bottom Layer w0.5: C108.1@37.5,8.5 37.6,8.6 R114.1@39,8.6
txesrb: C1.1 R6.1
txfba: IC6.4 R115.1 R116.2 | length 2.3
  Top Layer w0.2: IC6.4@40.5,4.2 40.7,4 R115.1@41.4,4 R116.2@42.7,4
txfbb: IC6.5 R7.1 R8.2
VDAC: IC1.D2 R243.2 | length 11.8
  Top Layer w0.076: 51.75,2.75 52.25,2.75 IC1.D2@52.5,2.5
  Top Layer w0.102: R243.2@41.65,1.7 42.5,1.7 42.95,1.7 43.15,1.5 45.15,1.5 45.35,1.7 45.35,2.1 46.15,2.1 46.55,2.5 49.2,2.5 51.5,2.5 51.75,2.75
VTEMP_ADC: IC1.D1 RT1.2 | length 4.5
  Top Layer w0.102: RT1.2@47.95,1.45 49.2,1.45 50.55,1.45 51.3,2.2 51.7,2.2 IC1.D1@52,2.5
pads on no net: IC1.A3 IC1.A4 IC1.A5 IC1.A6 IC1.A7 IC1.A9 IC1.A11 IC1.A13 IC1.B3 IC1.B4 IC1.B5 IC1.B6 IC1.B7 IC1.B9 IC1.B11 IC1.B13 IC1.C2 IC1.C6 IC1.C7 IC1.C8 IC1.C9 IC1.C12 IC1.C16 IC1.C17 IC1.D6 IC1.D7 IC1.D8 IC1.D9 IC1.D12 IC1.D16 IC1.D17 IC1.E2 IC1.E7 IC1.E10 IC1.E11 IC1.E12 IC1.E13 IC1.E14 IC1.E15 IC1.E16 IC1.E17 IC1.F7 IC1.F10 IC1.F11 IC1.F12 IC1.F13 IC1.F14 IC1.F15 IC1.G14 IC1.G15 IC1.G16 IC1.G17 IC1.H4 IC1.H14 IC1.H15 IC1.J4 IC1.J10 IC1.J14 IC1.J15 IC1.J16 IC1.J17 IC1.K4 IC1.K10 IC1.K14 IC1.K15 IC1.L4 IC1.L5 IC1.L7 IC1.L8 IC1.L9 IC1.L14 IC1.L15 IC1.L16 IC1.L17 IC1.M4 IC1.M5 IC1.M6 IC1.M7 IC1.M9 IC1.M10 IC1.M14 IC1.M15 IC1.N4 IC1.N5 IC1.N6 IC1.N7 IC1.N8 IC1.N9 IC1.N10 IC1.N11 IC1.N14 IC1.N15 IC1.N16 IC1.N17 IC1.P1 IC1.P6 IC1.P8 IC1.P10 IC1.P11 IC1.P12 IC1.P15 IC1.R1 IC1.R3 IC1.R6 IC1.R8 IC1.R10 IC1.R11 IC1.R12 IC1.R15 IC1.S IC1.T1 IC1.T2 IC1.T6 IC1.T8 IC1.T12 IC1.T14 IC1.T15 IC1.U1 IC1.U6 IC1.U8 IC1.U12 IC1.U14 IC1.U15 IC2.2 IC2.20 IC2.22 IC2.25 IC2.26 IC2.27 IC2.28 IC2.31 IC2.33 IC3.A5 IC3.A14 IC3.B3 IC3.B4 IC3.B5 IC3.B6 IC3.B7 IC3.B8 IC3.B9 IC3.B10 IC3.B11 IC3.B12 IC3.B13 IC3.B14 IC3.C1 IC3.C2 IC3.C3 IC3.C4 IC3.C5 IC3.C6 IC3.C7 IC3.C8 IC3.C9 IC3.C10 IC3.C11 IC3.C12 IC3.C13 IC3.C14 IC3.D1 IC3.D2 IC3.D3 IC3.D12 IC3.D13 IC3.D14 IC3.E3 IC3.E12 IC3.E13 IC3.E14 IC3.F1 IC3.F2 IC3.F3 IC3.F12 IC3.F13 IC3.F14 IC3.G1 IC3.G2 IC3.G3 IC3.G4 IC3.H1 IC3.H2 IC3.H3 IC3.H4 IC3.J1 IC3.J2 IC3.J3 IC3.J4 IC3.K1 IC3.K2 IC3.K3 IC3.L1 IC3.L2 IC3.L3 IC3.M1 IC3.M2 IC3.M3 IC3.N1 IC3.N2 IC3.N3 IC3.P1 IC3.P2 IC3.P3 IC4.A3 IC4.A4 IC4.A5 IC4.A6 IC4.A7 IC4.A9 IC4.A11 IC4.A13 IC4.A15 IC4.A16 IC4.A17 IC4.B3 IC4.B4 IC4.B5 IC4.B6 IC4.B7 IC4.B9 IC4.B11 IC4.B13 IC4.B15 IC4.B16 IC4.B17 IC4.C1 IC4.C2 IC4.C3 IC4.C4 IC4.C5 IC4.C6 IC4.C7 IC4.C8 IC4.C9 IC4.C10 IC4.C11 IC4.C12 IC4.C13 IC4.C14 IC4.C15 IC4.C16 IC4.C17 IC4.D1 IC4.D2 IC4.D4 IC4.D5 IC4.D6 IC4.D7 IC4.D8 IC4.D9 IC4.D10 IC4.D11 IC4.D12 IC4.D13 IC4.D14 IC4.D15 IC4.D16 IC4.D17 IC4.E1 IC4.E5 IC4.E6 IC4.E7 IC4.E10 IC4.E11 IC4.E12 IC4.E13 IC4.E14 IC4.E15 IC4.E16 IC4.E17 IC4.F5 IC4.F6 IC4.F7 IC4.F10 IC4.F11 IC4.F12 IC4.F13 IC4.F14 IC4.F15 IC4.G14 IC4.G15 IC4.G16 IC4.G17 IC4.H4 IC4.H14 IC4.H15 IC4.J4 IC4.J10 IC4.J14 IC4.J15 IC4.J16 IC4.J17 IC4.K4 IC4.K10 IC4.K14 IC4.K15 IC4.K16 IC4.K17 IC4.L1 IC4.L4 IC4.L5 IC4.L6 IC4.L7 IC4.L8 IC4.L9 IC4.L14 IC4.L15 IC4.L16 IC4.L17 IC4.M1 IC4.M4 IC4.M5 IC4.M6 IC4.M7 IC4.M8 IC4.M9 IC4.M10 IC4.M11 IC4.M14 IC4.M15 IC4.N4 IC4.N5 IC4.N6 IC4.N7 IC4.N8 IC4.N9 IC4.N10 IC4.N11 IC4.N12 IC4.N13 IC4.N14 IC4.N15 IC4.N16 IC4.N17 IC4.P4 IC4.P5 IC4.P6 IC4.P7 IC4.P8 IC4.P9 IC4.P10 IC4.P11 IC4.P12 IC4.P13 IC4.P14 IC4.P15 IC4.R3 IC4.R4 IC4.R5 IC4.R6 IC4.R7 IC4.R8 IC4.R9 IC4.R10 IC4.R11 IC4.R12 IC4.R13 IC4.R14 IC4.R15 IC4.R16 IC4.R17 IC4.T1 IC4.T2 IC4.T4 IC4.T6 IC4.T8 IC4.T9 IC4.T10 IC4.T12 IC4.T14 IC4.T15 IC4.T16 IC4.T17 IC4.U1 IC4.U4 IC4.U6 IC4.U8 IC4.U9 IC4.U10 IC4.U12 IC4.U14 IC4.U15 IC4.U16 IC4.U17 IC5.2 IC5.3 P2.3 P2.4 P3.3 P3.4 P11.1 P11.2 P14.3 P14.4 P15.3 P15.4
copper on no net: | length 966.3
  Top Layer w0.102: 11.5,11.6 14.4,8.7 v1(17.8,8.7) ; 60.55,-15.5 60.56,-15.51 ; 66.8,-4.6 67.5,-4.6 ; 82.8,-5.6 v1(83.7,-5.6) 85.2,-5.6 85.6,-5.2 ; v1(83.55,-0.1) 85.1,-0.1 85.6,0.4 ; 85.15,-0.85 85.6,-0.4
  Top Layer w0.13: 52.75,-3.25 53,-3.5 ; 55.75,2.75 56,2.5 ; 55.75,3.25 56,3 ; v1(67.5,-3.8) 67.545,-3.845 68.289,-3.845 68.365,-3.921 68.365,-4.315 68.65,-4.6 68.7,-4.6 ; 71.75,-3.25 72,-3.5 ; 75.25,-0.75 75.5,-0.5 ; 75.25,0.25 75.5,0 ; 87.2,2.8 87.6,3.2
  Top Layer w0.152: 126.75,-20 126.75,-21.75 129.25,-21.75 129.25,-20 ; 126.75,-20 126.75,-18.25 ; 126.75,-20 129.25,-20 ; 126.75,-18.25 126.75,-16.25 ; 126.75,-18.25 129.25,-18.25 ; 126.75,-16.25 126.75,-14.5 ; 126.75,-16.25 129.25,-16.25 ; 126.75,-14.5 126.75,-12.75 ; 126.75,-14.5 129.25,-14.5 ; 126.75,-12.75 126.75,-11 ; 126.75,-12.75 129.25,-12.75 ; 126.75,-11 126.75,-9.25 ; 126.75,-11 129.25,-11 ; 126.75,-9.25 126.75,-7.5 129.25,-7.5 129.25,-9.25 ; 126.75,-9.25 129.25,-9.25 ; 129.25,-20 129.25,-18.25 ; 129.25,-18.25 129.25,-16.25 ; 129.25,-16.25 129.25,-14.5 ; 129.25,-14.5 129.25,-12.75 ; 129.25,-12.75 129.25,-11 ; 129.25,-11 129.25,-9.25
  M1 w0.1: v1(67.5,-3.8) 68.2,-3.8 68.9,-4.5 72.2,-4.5 72.3,-4.4 72.3,-3.309 72.241,-3.25 71.75,-3.25
  M1 w0.102: v1(17.8,8.7) 20.4,6.1 33.8,6.1 37.8,2.1 43.25,2.1 ; v1(57.2,15.6) 57.5,15.9 113.5,15.9 114,15.4 114,6.5 ; v1(57.9,15.573) 57.9,15.6 113.1,15.6 113.7,15 113.7,14.3 112,12.6 107.8,12.6 105.5,10.3 ; v1(83.55,-0.1) 83.95,0.3 83.95,3.55 85.6,5.2 94.35,5.2 104.95,-5.4 119.75,-5.4 122.55,-2.6 122.55,2.95 119.1,6.4 ; 85.15,-0.85 85.15,0.75 86,1.6 86.8,1.6 87.2,2 87.2,3.5 87.5,3.8 94.2,3.8 95.6,2.4 95.6,0.8 103,-6.6 121.5,-6.6 124.8,-3.3 124.8,4 127.1,6.3 ; 105.5,9.6 105.5,5.6 105.531,5.569
  M1 w0.12: 24.1,14.8 24.1,14.5 25.5,13.1 45.9,13.1 55.25,3.75 55.25,3.25 55.75,2.75 ; 24.7,14.8 25.4,15.5 26.7,15.5 28.4,13.8 46.4,13.8 55.75,4.45 55.75,3.25
  M1 w0.203: 65.6,0.9 70.5,5.8 77.1,5.8 82.4,11.1 94.2,11.1 101.7,3.6 111.9,3.6 117.9,-2.4
  M2 w0.102: 70,-3.75 71.35,-5.1 83.2,-5.1 v1(83.7,-5.6)
  M2 w0.203: 11.25,0 11.25,-9.65 18.85,-17.25 114.15,-17.25 125.9,-5.5 125.9,-2.4
  Bottom Layer w0.076: 110.2,-1.4 110.2,-1.3
  Bottom Layer w0.1: 52.75,-3.25 52.75,-3.67 52.88,-3.8 53.374,-3.8 54.125,-4.551 55.923,-4.551 56.375,-4.099 58.055,-4.099 58.507,-4.551 60.187,-4.551 60.238,-4.5 60.8,-4.5 61.5,-3.8 v1(67.5,-3.8)
  Bottom Layer w0.102: 18.2,9.1 v1(17.8,8.7) 15.1,8.7 14.4,9.4 14.4,13.5 18.5,17.6 55.9,17.6 57.9,15.6 57.9,9.6 ; 18.6,8.5 18.1,8 15.4,8 14.1,9.3 14.1,13.9 18.1,17.9 57.3,17.9 58.3,16.9 62.2,16.9 62.9,17.6 73.7,17.6 74.4,16.9 112.4,16.9 115.4,13.9 v1(115.4,13) ; 19.4,9.1 19.9,8.6 34.8,8.6 36,9.8 49.4,9.8 53.6,5.6 61.8,5.6 62.9,4.5 68.5,4.5 70,3 70,-3.75 ; 57.2,9.7 v1(57.2,15.6) ; 82.8,-8.2 83.3,-8.2 83.7,-7.8 v1(83.7,-5.6) ; 82.8,-0.8 82.85,-0.8 v1(83.55,-0.1) ; 97.2,3 v1(97.2,3.75) ; 119.1,8.3 119.1,9.2 ; 127.1,8.3 127.1,9.2
  Bottom Layer w0.2: 84.3,-8.1 85.6,-8.1 86.9,-8.1 88.2,-8.1 v1(88.9,-8.1) ; 87.6,3.2 87.6,4 88.1,4.5 88.6,4.5 88.6,4.95 89.15,5.5 97.5,5.5 98.3,4.7 98.3,2.1 98,1.8 97.2,1.8 97.75,1.25 97.75,0
  Bottom Layer w0.203: 11.25,0 22,0 ; 65.6,0 65.6,0.9 ; 100.65,0 102.7,0 ; 105.6,0 109.2,0 109.7,0 110.2,-0.5 110.2,-1.3 ; 117.9,-2.4 117.95,-2.45 119.1,-2.45 ; 119.1,0.45 119.1,2.45 ; 119.1,5.35 119.1,7.1 ; 125.9,-2.4 125.95,-2.45 127.1,-2.45 ; 127.1,0.45 127.1,2.45 ; 127.1,5.35 127.1,7.1
  Bottom Layer w0.3: 56.75,-0.25 56.75,0.06 56.94,0.25

## Polygon pours and split planes (outlines as drawn)
GND on Top Layer "GND_L01_P000" (solid, pour order 0): 37.4,-3.5 37.4,-5.1 36.9,-5.6 35.2,-5.6 34.9,-5.9 34.9,-7.4 35.2,-7.7 37.6,-7.7 38.7,-6.6 38.7,-5.1 38.9,-4.9 42,-4.9 42.1,-5 43.2,-5 43.4,-5.2 43.4,-5.9 44.7,-5.9 44.7,-3.3 43.4,-3.3 43.4,-4.1 43.3,-4.2 41,-4.2 40.8,-4.4 38.85,-4.4 38.6,-4.15 38.6,-3.5
GND on plane 1 (split plane): 129.79,-27.74 0.51,-27.74 0.51,27.74 129.79,27.74
no net on plane 2 (split plane): 129.79,-27.74 0.51,-27.74 0.51,27.74 129.79,27.74
no net on plane 2 (split plane): 77.608,-3.292 77.65,-3.32 77.7,-3.329 85.2,-3.329 85.25,-3.32 85.292,-3.292 85.654,-2.929 92.271,-2.929 92.271,-8.7 92.28,-8.75 92.308,-8.792 92.35,-8.82 92.4,-8.829 111.996,-8.829 113.121,-9.954 113.121,-15.821 94.95,-15.821 94.929,-15.825 94.908,-15.821 78.4,-15.821 78.35,-15.83 78.308,-15.858 77.746,-16.421 65.504,-16.421 64.992,-15.908 64.95,-15.88 64.9,-15.871 18.304,-15.871 17.379,-14.946 17.379,-9.804 18.054,-9.129 43.4,-9.129 43.45,-9.12 43.492,-9.092 49.204,-3.379 51.25,-3.379 51.3,-3.37 51.342,-3.342 52.304,-2.379 73.75,-2.379 73.8,-2.37 73.842,-2.342 74.304,-1.879 76.196,-1.879
no net on plane 2 (split plane): 113.921,15.846 113.921,9.304 112.796,8.179 102.554,8.179 98.942,11.792 98.9,11.82 98.85,11.829 82.05,11.829 82,11.82 81.958,11.792 76.646,6.479 64.1,6.479 64.05,6.47 64.008,6.442 59.946,2.379 55.554,2.379 55.092,2.842 55.05,2.87 55,2.879 54.304,2.879 45.292,11.892 45.25,11.92 45.2,11.929 31.3,11.929 31.25,11.92 31.208,11.892 27.496,8.179 18.879,8.179 18.879,11.346 22.192,14.658 22.22,14.7 22.229,14.75 22.229,15.646 23.754,17.171 112.596,17.171
no net on plane 3 (split plane): 70.471,12.629 66.3,12.629 66.25,12.62 66.208,12.592 65.508,11.892 65.48,11.85 65.471,11.8 65.471,8.7 65.48,8.65 65.508,8.608 65.55,8.58 65.6,8.571 74.1,8.571 74.15,8.58 74.192,8.608 81.854,16.271 113.871,16.271 113.871,13.154 112.446,11.729 105.1,11.729 105.05,11.72 105.008,11.692 104.98,11.65 104.971,11.6 104.971,9.029 101.7,9.029 101.65,9.02 101.608,8.992 101.58,8.95 101.571,8.9 101.571,-11.5 101.58,-11.55 101.608,-11.592 101.65,-11.62 101.7,-11.629 109.8,-11.629 109.85,-11.62 109.892,-11.592 109.92,-11.55 109.929,-11.5 109.929,-9.029 113.121,-9.029 113.121,-17.571 97.5,-17.571 97.45,-17.58 97.408,-17.608 97.38,-17.65 97.371,-17.7 97.371,-27.74 75.129,-27.74 75.129,-8.5 75.12,-8.45 75.092,-8.408 75.05,-8.38 75,-8.371 60.5,-8.371 60.45,-8.38 60.408,-8.408 60.38,-8.45 60.371,-8.5 60.371,-10.5 60.38,-10.55 60.408,-10.592 62.008,-12.192 62.05,-12.22 62.1,-12.229 66.446,-12.229 68.671,-14.454 68.671,-16.371 17.629,-16.371 17.629,-14.054 20.054,-11.629 25,-11.629 25.05,-11.62 25.092,-11.592 25.12,-11.55 25.129,-11.5 25.129,5.871 29,5.871 29.05,5.88 29.092,5.908 29.12,5.95 29.129,6 29.129,12 29.12,12.05 29.092,12.092 29.05,12.12 29,12.129 18.8,12.129 18.75,12.12 18.708,12.092 18.68,12.05 18.671,12 18.671,9.129 14.629,9.129 14.629,16.371 34.2,16.371 34.25,16.38 34.292,16.408 34.32,16.45 34.329,16.5 34.329,27.74 70.471,27.74
no net on plane 3 (split plane): 34.071,16.629 14.5,16.629 14.45,16.62 14.408,16.592 14.38,16.55 14.371,16.5 14.371,9 14.38,8.95 14.408,8.908 14.45,8.88 14.5,8.871 18.8,8.871 18.85,8.88 18.892,8.908 18.92,8.95 18.929,9 18.929,11.871 28.871,11.871 28.871,6.129 25,6.129 24.95,6.12 24.908,6.092 24.88,6.05 24.871,6 24.871,-11.371 20.129,-11.371 20.129,-8 20.12,-7.95 20.092,-7.908 20.05,-7.88 20,-7.871 0.51,-7.871 0.51,27.74 34.071,27.74
no net on plane 3 (split plane): 19.871,-11.446 17.408,-13.908 17.38,-13.95 17.371,-14 17.371,-16.5 17.38,-16.55 17.408,-16.592 17.45,-16.62 17.5,-16.629 68.8,-16.629 68.85,-16.62 68.892,-16.592 68.92,-16.55 68.929,-16.5 68.929,-14.4 68.92,-14.35 68.892,-14.308 66.592,-12.008 66.55,-11.98 66.5,-11.971 62.154,-11.971 60.629,-10.446 60.629,-8.629 74.871,-8.629 74.871,-27.74 0.51,-27.74 0.51,-8.129 19.871,-8.129
no net on plane 3 (split plane): 95.371,-6.371 89.729,-6.371 89.729,2.8 89.72,2.85 89.692,2.892 89.65,2.92 89.6,2.929 83.854,2.929 82.629,4.154 82.629,5.471 95.371,5.471
no net on plane 3 (split plane): 111.071,7 111.08,6.95 111.108,6.908 111.15,6.88 111.2,6.871 129.79,6.871 129.79,-27.74 97.629,-27.74 97.629,-17.829 113.25,-17.829 113.3,-17.82 113.342,-17.792 113.37,-17.75 113.379,-17.7 113.379,-8.9 113.37,-8.85 113.342,-8.808 113.3,-8.78 113.25,-8.771 109.8,-8.771 109.75,-8.78 109.708,-8.808 109.68,-8.85 109.671,-8.9 109.671,-11.371 101.829,-11.371 101.829,8.771 105.1,8.771 105.15,8.78 105.192,8.808 105.22,8.85 105.229,8.9 105.229,11.471 111.071,11.471
no net on plane 3 (split plane): 83.708,2.708 83.75,2.68 83.8,2.671 89.471,2.671 89.471,-6.371 83.654,-6.371 80.029,-2.746 80.029,3.971 82.446,3.971
no net on plane 3 (split plane): 129.79,7.129 111.329,7.129 111.329,11.471 112.5,11.471 112.55,11.48 112.592,11.508 114.092,13.008 114.12,13.05 114.129,13.1 114.129,16.4 114.12,16.45 114.092,16.492 114.05,16.52 114,16.529 81.8,16.529 81.75,16.52 81.708,16.492 74.046,8.829 65.729,8.829 65.729,11.746 66.354,12.371 70.6,12.371 70.65,12.38 70.692,12.408 70.72,12.45 70.729,12.5 70.729,27.74 129.79,27.74
GND on plane 4 (split plane): 129.79,-27.74 0.51,-27.74 0.51,27.74 129.79,27.74

## Other copper
Top Layer:
  rectangle net GND: 38.25,4.6 38.75,5.75
  rectangle net GND: 38.25,4.65 39.05,5.55
  rectangle net GND: 38,-5.15 38.7,-3.9
  rectangle net GND: 38.6,-5.1 39.05,-4.15
  rectangle net GND: 80.2,4.35 81.6,5.25
  text "1" at 128.746,-21.121 h1.52 r90
  text "'.Pcb_File_Name_No_Path'     '.Layer_Name'    '.Print_Date'    '.Print_Time'" at 9.954,-31.338 h1.52
M1:
  text "3" at 128.746,-17.746 h1.52 r90
  text "'.Pcb_File_Name_No_Path'    '.Layer_Name'    '.Print_Date'    '.Print_Time'" at 9.954,-31.392 h1.52
M2:
  text "6" at 128.746,-12.371 h1.52 r90
  text "'.Pcb_File_Name_No_Path'    '.Layer_Name'    '.Print_Date'    '.Print_Time'" at 9.954,-31.392 h1.52
Bottom Layer:
  rectangle net GND: 38.05,4.6 38.75,5.75
  rectangle net GND: 37.5,-5.1 38.7,-3.9
  rectangle net GND: 26.1,2.1 27.9,3.1
  rectangle net GND: 28.2,2.4 29.9,3.3
  rectangle net GND: 28.1,-3.3 29.4,-2.4
  rectangle net 1V2_RB: 25.3,3.4 26.3,4.2
  rectangle net 2V5TX: 29.85,3.6 30.65,4.4
  rectangle net 2V5RX: 28.1,-4.4 28.9,-3.6
  text "8" at 128.746,-8.871 h1.52 r90
  text "'.Pcb_File_Name_No_Path'    '.Layer_Name'    '.Print_Date'    '.Print_Time'" at 9.954,-31.338 h1.52
plane 1 (plane layer: these items are gaps in the copper):
  rectangle: 12,-5 24.2,5
  rectangle: 126.75,-18.25 129.25,-7.5
  text "2" at 128.746,-19.621 h1.52 r90
  text "'.Pcb_File_Name_No_Path'    '.Layer_Name'    '.Print_Date'    '.Print_Time'" at 9.954,-31.338 h1.52
plane 2 (plane layer: these items are gaps in the copper):
  rectangle: 12,-5 24.2,5
  rectangle: 126.75,-20 129.25,-16.25
  rectangle: 126.75,-14.5 129.25,-7.5
  lines w0.254: 94.908,-15.95 78.4,-15.95 77.8,-16.55 71,-16.55 65.45,-16.55 64.9,-16 18.25,-16 17.25,-15 17.25,-9.75 18,-9 43.4,-9 49.15,-3.25 51.25,-3.25 52.25,-2.25 63.25,-2.25 73.75,-2.25 74.25,-1.75 76.25,-1.75 77.7,-3.2 82,-3.2 85.2,-3.2 85.6,-2.8 92.4,-2.8 92.4,-8.7 112.05,-8.7 113.25,-9.9 113.25,-15.95 94.95,-15.95 ; 18.75,8.05 18.75,11.4 22.1,14.75 22.1,15.7 23.7,17.3 112.65,17.3 114.05,15.9 114.05,9.25 112.85,8.05 102.5,8.05 98.85,11.7 82.05,11.7 76.7,6.35 64.1,6.35 60,2.25 55.5,2.25 55,2.75 54.25,2.75 45.2,11.8 31.3,11.8 27.55,8.05 18.75,8.05
  text "4" at 128.746,-15.871 h1.52 r90
  text "'.Pcb_File_Name_No_Path'    '.Layer_Name'    '.Print_Date'    '.Print_Time'" at 9.954,-31.338 h1.52
plane 3 (plane layer: these items are gaps in the copper):
  rectangle: 126.75,-20 129.25,-14.5
  rectangle: 126.75,-12.75 129.25,-7.5
  lines w0.254: 0,-8 20,-8 20,-11.5 ; 28.5,28.2 28.5,28.3 ; 29,28.2 29,28.3 ; 34.2,28.3 34.2,16.5 14.5,16.5 14.5,9 18.8,9 18.8,12 29,12 29,6 25,6 25,-11.5 20,-11.5 ; 70.6,28.3 70.6,12.5 69.2,12.5 66.3,12.5 65.6,11.8 65.6,8.7 74.1,8.7 81.8,16.4 114,16.4 114,13.1 112.5,11.6 111.2,11.6 ; 75,-28 75,-8.5 60.5,-8.5 60.5,-10.5 62.1,-12.1 66.5,-12.1 68.8,-14.4 68.8,-16.5 17.5,-16.5 17.5,-14 20,-11.5 ; 89.6,-6.5 89.6,2.8 83.8,2.8 82.5,4.1 ; 97.5,-28.3 97.5,-17.7 113.25,-17.7 113.25,-8.9 109.8,-8.9 109.8,-11.5 101.7,-11.5 101.7,8.9 105.1,8.9 105.1,11.6 111.2,11.6 ; 130.3,7 130.3,7.1 130.2,7 111.2,7 111.2,11.6 ; 82.5,4.1 79.9,4.1 79.9,-2.8 83.6,-6.5 95.5,-6.5 95.5,5.6 82.5,5.6 82.5,4.1
  text "5" at 128.746,-14.121 h1.52 r90
  text "'.Pcb_File_Name_No_Path'    '.Layer_Name'     '.Print_Date'     '.Print_Time'" at 9.954,-31.338 h1.52
plane 4 (plane layer: these items are gaps in the copper):
  rectangle: 126.75,-9.25 129.25,-7.5
  rectangle: 126.75,-20 129.25,-12.75
  text "7" at 128.746,-10.621 h1.52 r90
  text "'.Pcb_File_Name_No_Path'    '.Layer_Name'    '.Print_Date'    '.Print_Time'" at 9.954,-31.338 h1.52

## Silkscreen, mask and mechanical layers (free items; w line width, h text height)
Top Overlay:
  lines w0.102: 12.15,-4.75 24,-4.75 24,4.75 12.15,4.75 12.15,-4.75
  text "11_06_2020" at 8.892,-6.946 h1.52 r90
  text "ETL_RB_v1.7" at 5.561,-10.2 h2.03 r90
  text "'.Pcb_File_Name_No_Path'    '.Layer_Name'    '.Print_Date'    '.Print_Time'" at 9.854,-31.338 h1.52
Bottom Overlay:
  text "ETL_RB_v1.7" at 5.061,10.1 h2.03 r90
  text "11_06_2020" at 8.292,6.946 h1.52 r90
  text "'.Pcb_File_Name_No_Path'    '.Layer_Name'    '.Print_Date'    '.Print_Time'" at 15.054,-30.938 h1.52
Top Paste:
  text "'.Pcb_File_Name_No_Path'    '.Layer_Name'    '.Print_Date'    '.Print_Time'" at 9.754,-31.438 h1.52
Bottom Paste:
  text "'.Pcb_File_Name_No_Path'    '.Layer_Name'    '.Print_Date'    '.Print_Time'" at 9.754,-31.692 h1.52
Top Solder:
  text "'.Pcb_File_Name_No_Path'    '.Layer_Name'    '.Print_Date'    '.Print_Time'" at 9.754,-31.438 h1.52
Bottom Solder:
  text "'.Pcb_File_Name_No_Path'    '.Layer_Name'    '.Print_Date'    '.Print_Time'" at 9.754,-31.692 h1.52
Drill Guide:
  text "'.Pcb_File_Name_No_Path'    '.Layer_Name'    '.Print_Date'    '.Print_Time'" at 9.754,-31.692 h1.52
Mechanical 14:
  the board outline again, w0.15
  text "'.Pcb_File_Name_No_Path'    '.Layer_Name'    '.Print_Date'    '.Print_Time'" at 9.954,-31.292 h1.52
  text "We adopted the layer stack recommended by you. The stack file is included in the manufacturing documentation." at -16.046,-34.138 h1.52
  text "The surfatce treatment of top and bottom layers is immersion gold." at -16.346,-36.738 h1.52
  text "We have high voltage up to 1000V on some components, so please chose the solder mask material with this in mind." at -16.146,-40.038 h1.52
  text "Traces with 0.12mm width are impedance controlled signals. Please tune the width to get to 50 Ohm." at -16.346,-43.038 h1.52
Drill Drawing:
  text "'.Pcb_File_Name_No_Path'    '.Layer_Name'    '.Print_Date'    '.Print_Time'" at 9.954,-31.338 h1.52

## Dimensions
137.8,-28.25 to 125.3,28.25 on Mechanical 14
0,44.1 to 130.3,23.25 on Mechanical 14

## Text inside footprints (layer, text, board x,y; h text height)
D1: Top Overlay "K" at 50.917,16.495 h1 r270
D2: Top Overlay "K" at 46.411,-5.7 h1 r90
D3: Top Overlay "K" at 64.268,-1.6 h1 r270
D4: Top Overlay "K" at 165.699,42.55 h1
D5: Top Overlay "K" at 37.2,34.95 h1
D6: Top Overlay "K" at 32.2,34.95 h1